# Altium PCB SW-RPi-Zero-A.PcbDoc
Units mil, origin at the board's own origin, x right, y up, seen from the top; angles counter-clockwise.
Board outline 2559.06 x 1220.47 mil, 2 copper layers (Top Layer, Bottom Layer), stack 57.918 mil thick; 11 components, 0 nets, 52 pads, 0 vias.
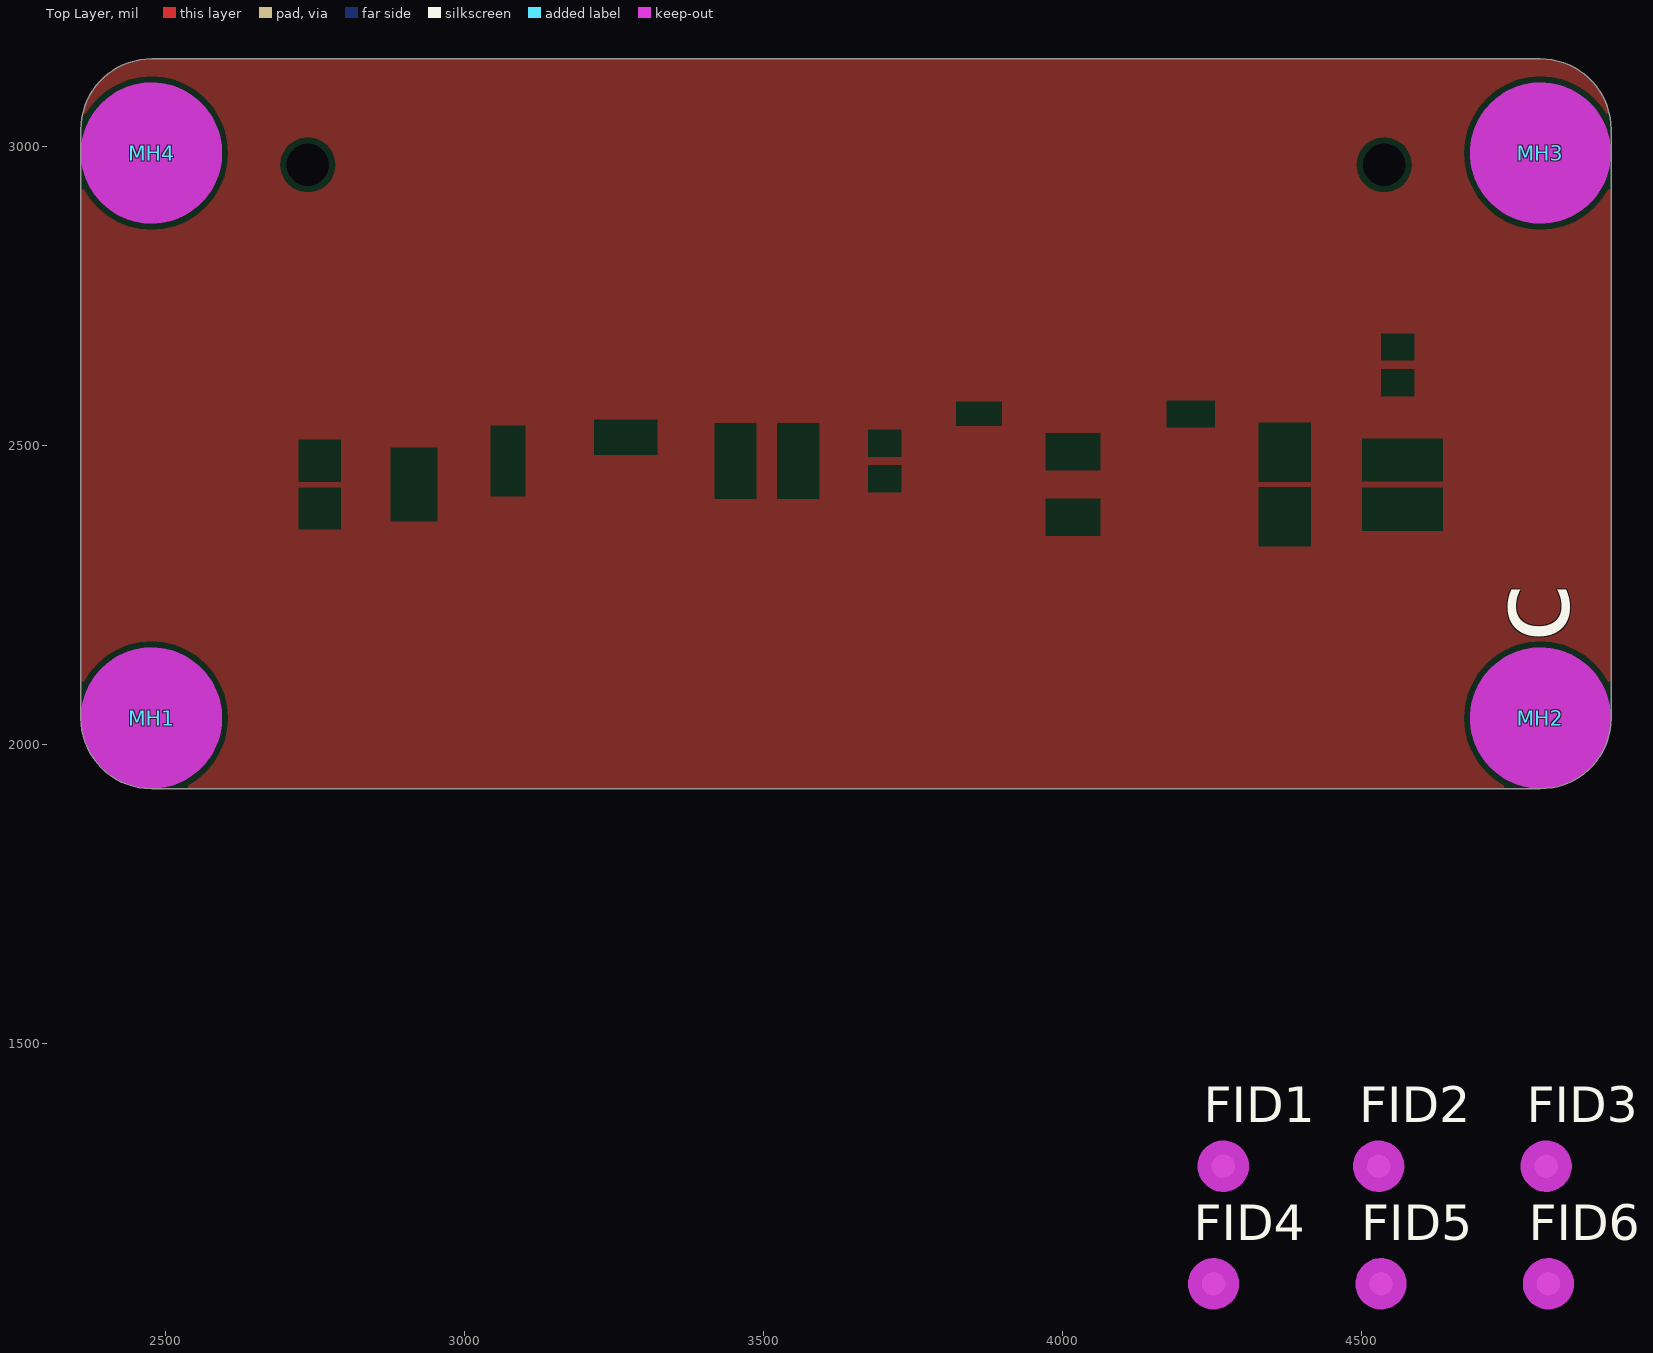
[diagram p0: Top Layer view]
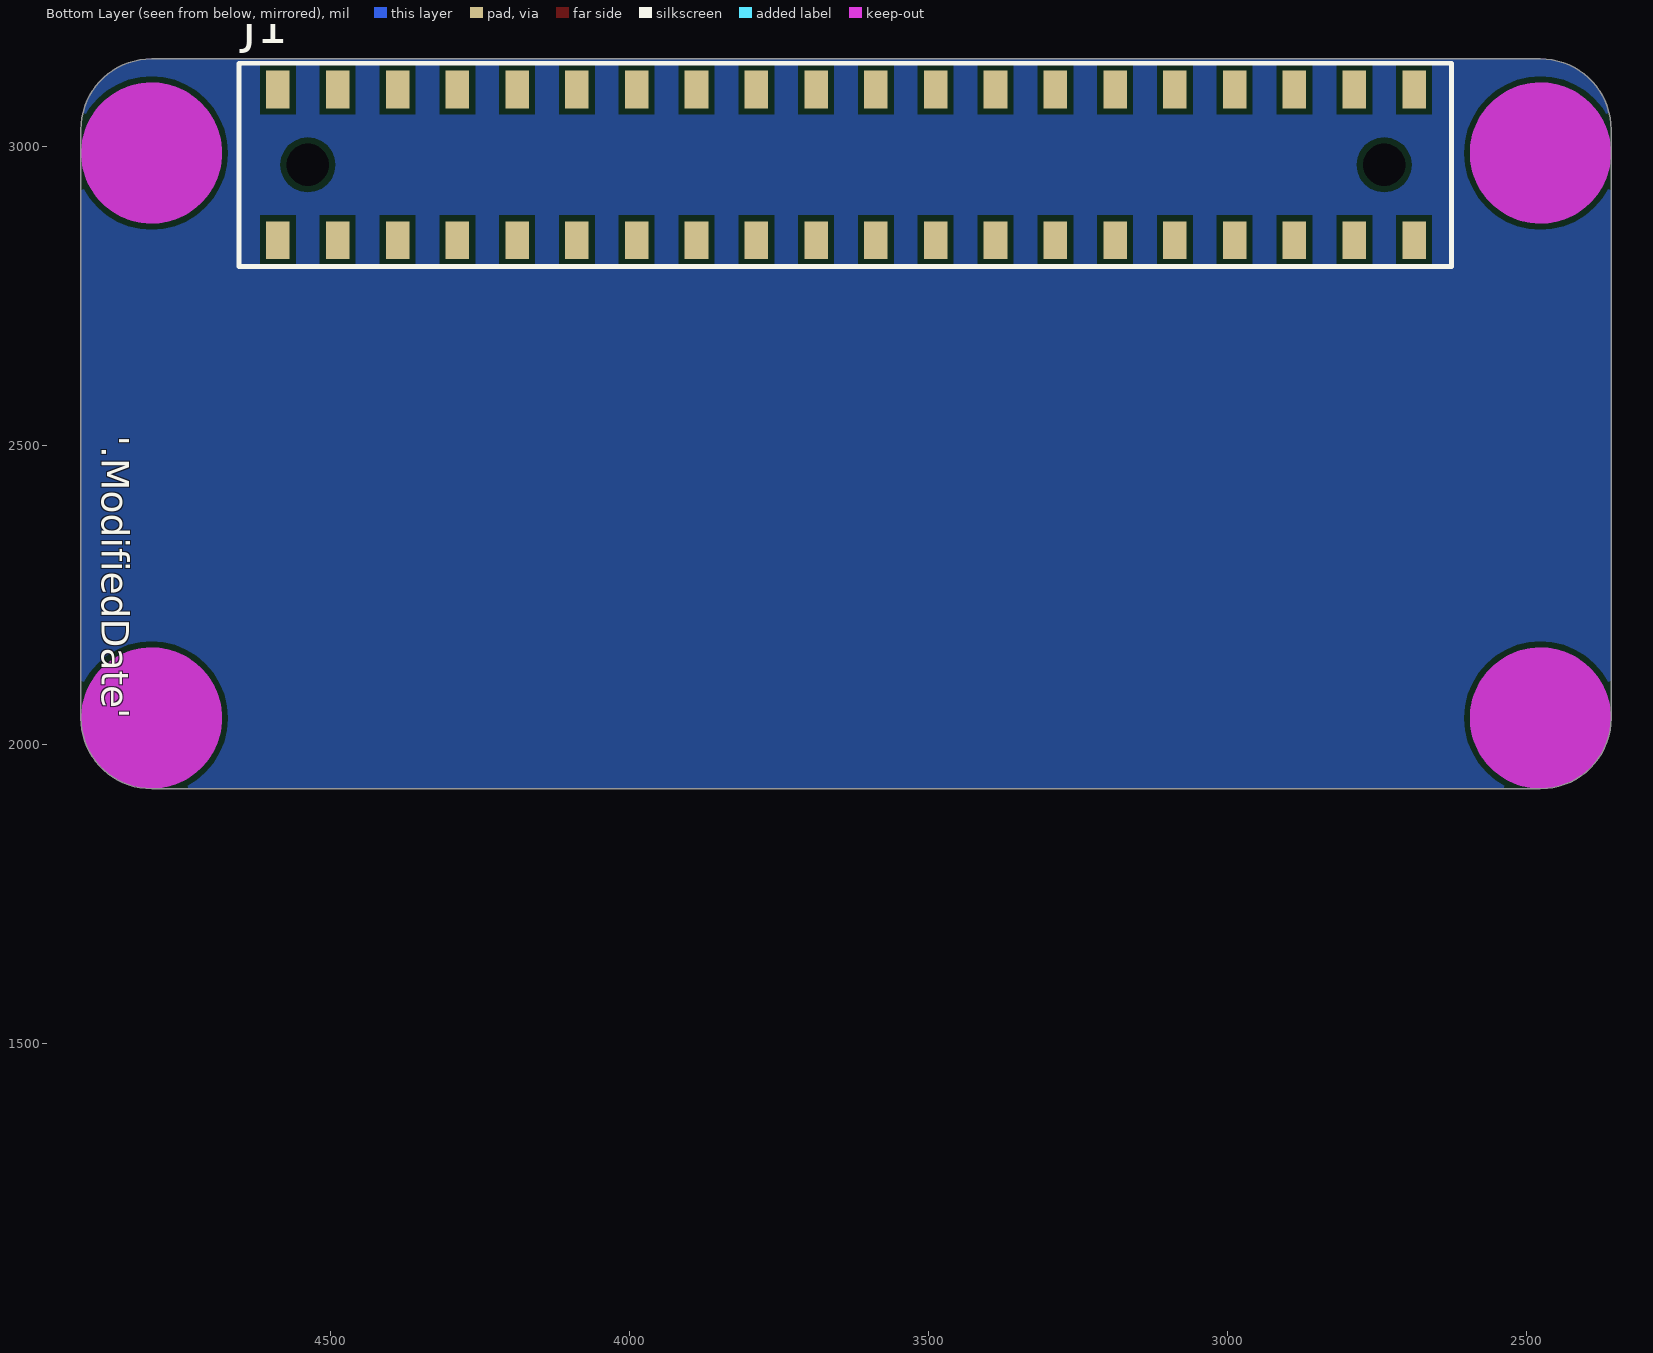
[diagram p1: Bottom Layer view, seen from below]

## Layer stack, top to bottom
Top Solder: solder mask 0.4, Solder Resist, Dk 3.5
Top Layer: signal copper 1.4
Dielectric1: dielectric 55.1181, FR-4, Dk 4.8
Bottom Layer: signal copper 1.4
Bottom Solder: solder mask 0.4, Solder Resist, Dk 3.5

## Board outline
2359.06,2044.09 ccw(c2477.17,2044.09) 2477.17,1925.98 4800,1925.98 ccw(c4800,2044.09) 4918.11,2044.09 4918.11,3028.35 ccw(c4800,3028.35) 4800,3146.46 2477.17,3146.46 ccw(c2477.17,3028.35) 2359.06,3028.35

## Design rules (kind name [scope] priority, off if disabled: settings)
Clearance Clearance_1 [All] p1: gap=10 ignorepadtopadclearanceinfootprint=FALSE except(0: Arc-Hole Track-Hole SMDPad-Hole THPad-Hole Via-Hole Fill-Hole Poly-Hole Region-Hole Text-Hole)
FabricationTestPointUsage TestPointUsage [All] p1: valid=0 allowmultiple=FALSE
FabricationTestpoint Testpoint [All] p1: side=3 testpointundercomponent=TRUE minsize=40 maxsize=100 preferedsize=60 minholesize=0 maxholesize=40 preferedholesize=32 testpointgrid=1 allowsidetop=TRUE allowsidebottom=TRUE usegrid=TRUE gridtolerance=0.01
PolygonConnect [All] p1: connectstyle=Relief reliefconductorwidth=10 reliefentries=4 polygonreliefangle="90 Angle" airgapwidth=10
RoomDefinition SW-RPi-Zero-A [InComponentClass('SW-RPi-Zero-A')] p1: confinementstyle=ConfineIn formatcopy=TRUE lockcomponents=FALSE outline -400,-400 1600,-400 1600,600 -400,600
RoutingVias [All] p1: holewidth=28 width=50 viastyle="Through Hole" minholewidth=28 minwidth=50 maxholewidth=28 maxwidth=50
SilkToSolderMaskClearance SilkscreenOverComponentPads [IsPad] p1: minsilkscreentomaskgap=10 clearancetoexposedcopper=TRUE
SolderMaskExpansion [All] p1: expansion=4 istentingtop=FALSE
Width [All] p1: maxlimit=10 minlimit=10 preferedwidth=10
27 further rules are at their usual default settings.

## Components (designator, comment, footprint, x,y, rotation, side; value= is the part's Value field where it differs from the comment)
FID1 "Fiducial" FID10-20 4269.61,1294.72 r270 top
FID2 "Fiducial" FID10-20 4529.61,1294.72 r270 top
FID3 "Fiducial" FID10-20 4809.61,1294.72 r270 top
FID4 "Fiducial" FID10-20 4253.35,1097.87 r270 top
FID5 "Fiducial" FID10-20 4533.35,1097.87 r270 top
FID6 "Fiducial" FID10-20 4813.35,1097.87 r270 top
J1 "2*20P 2.54 SMT Female  4mmH" "SMT2X20/2.54X3.5 NONHOLE" 3638.58,2969.29 r0 bottom
MH1 "MH" M2.5 2477.17,2044.09 r180 top
MH2 "MH" M2.5 4800,2044.09 r180 top
MH3 "MH" M2.5 4800,2988.98 r180 top
MH4 "MH" M2.5 2477.17,2988.98 r180 top

## Footprints (in the part's own frame and the unit in brackets; to place one, negate y for a bottom-side part, rotate by r counter-clockwise, add the part's x,y. Pads: shape width x height; smd on the part's side, far side on the other; paste and mask are expansions set on the pad)
FID10-20 [mm] "Fiducial mark.  There is nothing to buy or mount."
  round 1 smd mask+0.5: 1(0,0)
  Top Layer keep-out circle w1.178: c0,0 r0.5
M2.5 [mm]
  round 2.5 hole 2.7 unplated paste+0 mask+1.75: M2.5(0,0)
  Keep-Out Layer circle w3: c0,0 r1.5
"SMT2X20/2.54X3.5 NONHOLE" [mm]
  round 1.6 hole 1.8 unplated: 0(-22.86,0) 0(22.86,0)
  rect 1x1.6 smd: 1(-24.13,3.2) 2(-24.13,-3.2) 3(-21.59,3.2) 4(-21.59,-3.2) 5(-19.05,3.2) 6(-19.05,-3.2) 7(-16.51,3.2) 8(-16.51,-3.2) 9(-13.97,3.2) 10(-13.97,-3.2) 11(-11.43,3.2) 12(-11.43,-3.2) 13(-8.89,3.2) 14(-8.89,-3.2) 15(-6.35,3.2) 16(-6.35,-3.2) 17(-3.81,3.2) 18(-3.81,-3.2) 19(-1.27,3.2) 20(-1.27,-3.2) 21(1.27,3.2) 22(1.27,-3.2) 23(3.81,3.2) 24(3.81,-3.2) 25(6.35,3.2) 26(6.35,-3.2) 27(8.89,3.2) 28(8.89,-3.2) 29(11.43,3.2) 30(11.43,-3.2) 31(13.97,3.2) 32(13.97,-3.2) 33(16.51,3.2) 34(16.51,-3.2) 35(19.05,3.2) 36(19.05,-3.2) 37(21.59,3.2) 38(21.59,-3.2) 39(24.13,3.2) 40(24.13,-3.2)
  silkscreen extent -25.72,-4.32 25.78,4.32, body extent -25.54,-3.73 25.66,3.47, height 3.77

## Part data
FID1 FID2 FID3 FID4 FID5 FID6: "Fiducial mark.  There is nothing to buy or mount.", Manufacturer=N/A, ClassName=FiducialMark, CompType=Fiducial, LatestRevisionDate=2014-10-27, LatestRevisionNote="Added Alternate PartNumber and Alternate Manufacturer parameters to appropriate components.", MountType=N/A, PackageReference=N/A, PartNumber=N/A, Publisher="Texas Instruments", SymbolCreator=codlsc, SymbolVersion=2009-11-4
J1: library part RPi-Connector-40P
MH1 MH2 MH3 MH4: "安装孔-附加安装铜柱信息"

## Nets (pads, with @x,y where several pads share a name; then routed paths per layer and width w, separated by ;. In a path a pad name is that pad's centre, name@x,y a point inside that pad or via, vN(x,y) a via of type N, cw(c..) or ccw(c..) an arc to the next point about the centre after c; other vN are vias at no path point)
pads on no net: FID1.1 FID2.1 FID3.1 FID4.1 FID5.1 FID6.1 J1.0 J1.1 J1.2 J1.3 J1.4 J1.5 J1.6 J1.7 J1.8 J1.9 J1.10 J1.11 J1.12 J1.13 J1.14 J1.15 J1.16 J1.17 J1.18 J1.19 J1.20 J1.21 J1.22 J1.23 J1.24 J1.25 J1.26 J1.27 J1.28 J1.29 J1.30 J1.31 J1.32 J1.33 J1.34 J1.35 J1.36 J1.37 J1.38 J1.39 J1.40 MH1.M2.5 MH2.M2.5 MH3.M2.5 MH4.M2.5

## Polygon pours and split planes (outlines as drawn)
no net on Bottom Layer "NONET_L02_P001" (solid, pour order 1): 2359.06,2044.09 2359.06,3028.35 cw(c2477.17,3028.35) 2477.17,3146.46 4800,3146.46 cw(c4800,3028.35) 4918.11,3028.35 4918.11,2044.09 cw(c4800,2044.09) 4800,1925.98 2477.17,1925.98 cw(c2477.17,2044.09)
no net on Top Layer "NONET_L01_P000" (solid, pour order 0): 2359.06,2044.09 2359.06,3028.35 cw(c2477.17,3028.35) 2477.17,3146.46 4800,3146.46 cw(c4800,3028.35) 4918.11,3028.35 4918.11,2044.09 cw(c4800,2044.09) 4800,1925.98 2477.17,1925.98 cw(c2477.17,2044.09)

## Silkscreen, mask and mechanical layers (free items; w line width, h text height)
Top Overlay:
  text "c" at 4890.55,2170.08 h228.35 r90
Bottom Overlay:
  text "'.ModifiedDate'" at 4898.43,2516.54 h78.74 r90
Board Outline:
  the board outline again, w3.94
Sheet Detail:
  lines w3.94: 7600,0 7600,1250 11100,1250 ; 7600,400 9350,400 11100,400 ; 7600,600 9350,600 ; 7600,800 9350,800 ; 9350,0 9350,1250 ; 9350,201.74 11098.26,201.74 11100,200
  lines w5: -200,1700 0,1700 ; -200,3600 0,3600 ; -200,5500 0,5500 ; 2675,-200 2675,0 ; 2675,7200 2675,7400 ; 5550,-200 5550,0 ; 5550,7200 5550,7400 ; 8425,-200 8425,0 ; 8425,7200 8425,7400 ; 11100,1700 11300,1700 ; 11100,3600 11300,3600 ; 11100,5500 11300,5500 ; -200,-200 11300,-200 11300,7400 -200,7400 -200,-200 ; 0,0 11100,0 11100,7200 0,7200 0,0
  text "1" at 1227,7265 h70
  text "2" at 4087,7265 h70
  text "3" at 6967,7265 h70
  text "4" at 9837,7265 h70
  text "A" at -125,6359 h70
  text "A" at 11175,6359 h70
  text "B" at -125,4467 h70
  text "B" at 11175,4467 h70
  text "C" at -125,2557 h70
  text "C" at 11175,2557 h70
  text "Item:" at 7650,1100 h100
  text "SoundWedge-A5" at 7598.7,800 h250
  text "D" at -125,667 h70
  text "Rev:" at 7700,600.83 h200
  text "V1I1" at 8150,600.8 h200
  text "c" at 9350,600 h511.81
  text "A5" at 8400,442.32 h200
  text "www.soundwedge.com.hk" at 9477.11,439.82 h157.48
  text "Variant:" at 7700,400 h200
  text "FileName:" at 7650,251.21 h150
  text "Author：" at 9399.08,226.74 h157.48
  text "LeiHongLun" at 9950,225 h157.48
  text "'.Pcb_File_Name_No_Path'" at 7700,50 h150
  text "Date:" at 9400,24.24 h150
  text "'.ModifiedDate'" at 9800,-2.91 h157.48
  text "1" at 1227,-135 h70
  text "2" at 4087,-135 h70
  text "4" at 9837,-135 h70